# Altium PCB PCB1.PcbDoc
Units mm, origin at the board's own origin, x right, y up, seen from the top; angles counter-clockwise.
Board outline 60 x 125 mm, 2 copper layers (Top Layer, Bottom Layer), stack 1.48 mm thick; 50 components, 47 nets, 159 pads, 20 vias.
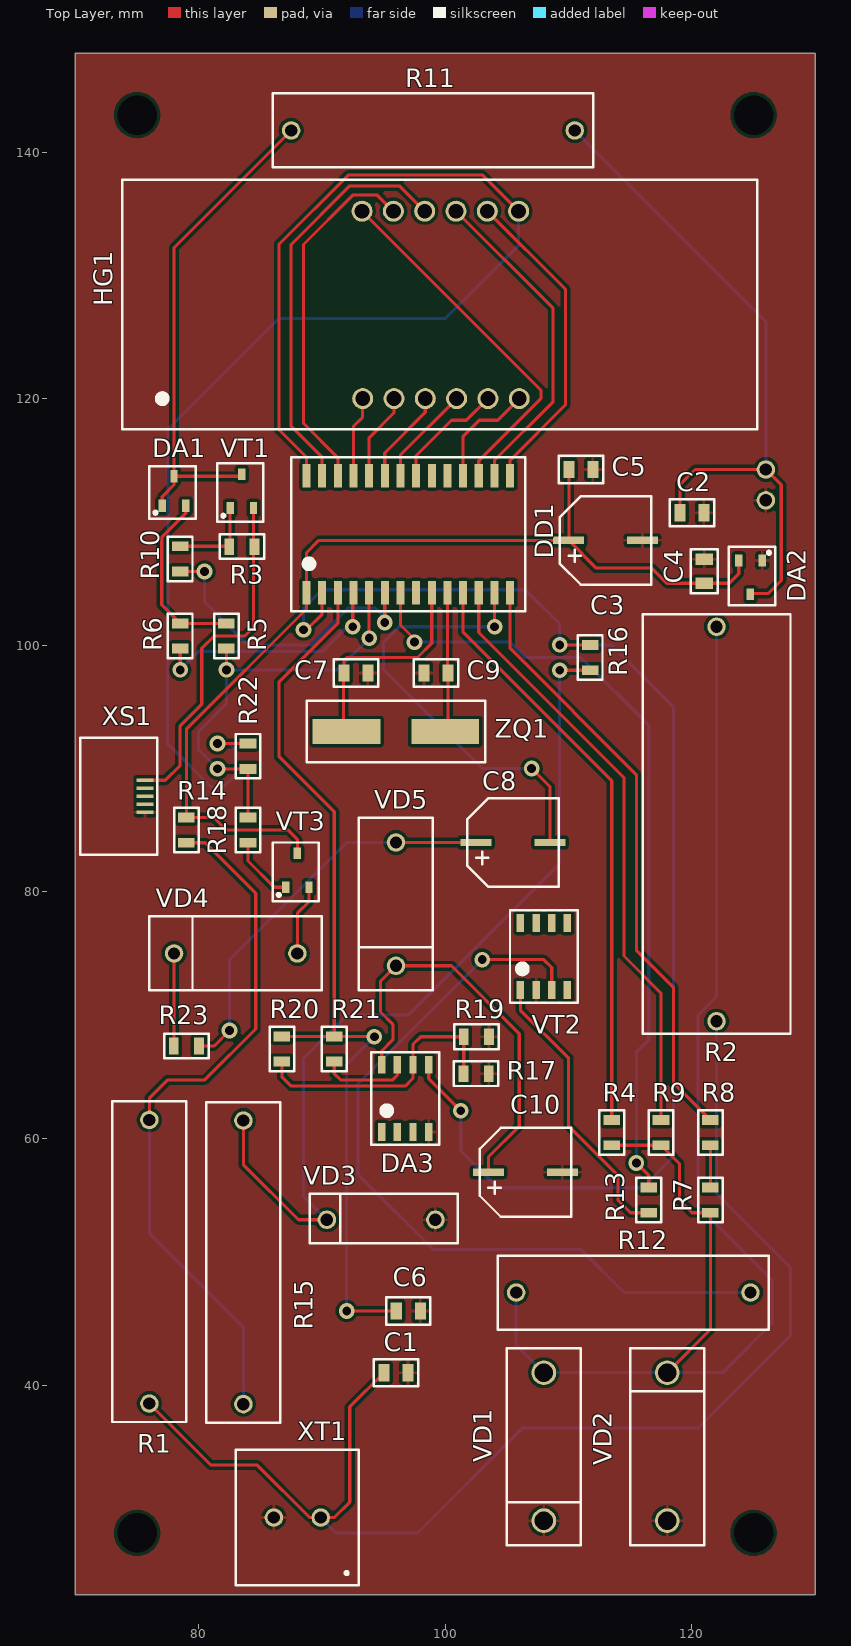
[diagram p0: Top Layer view]
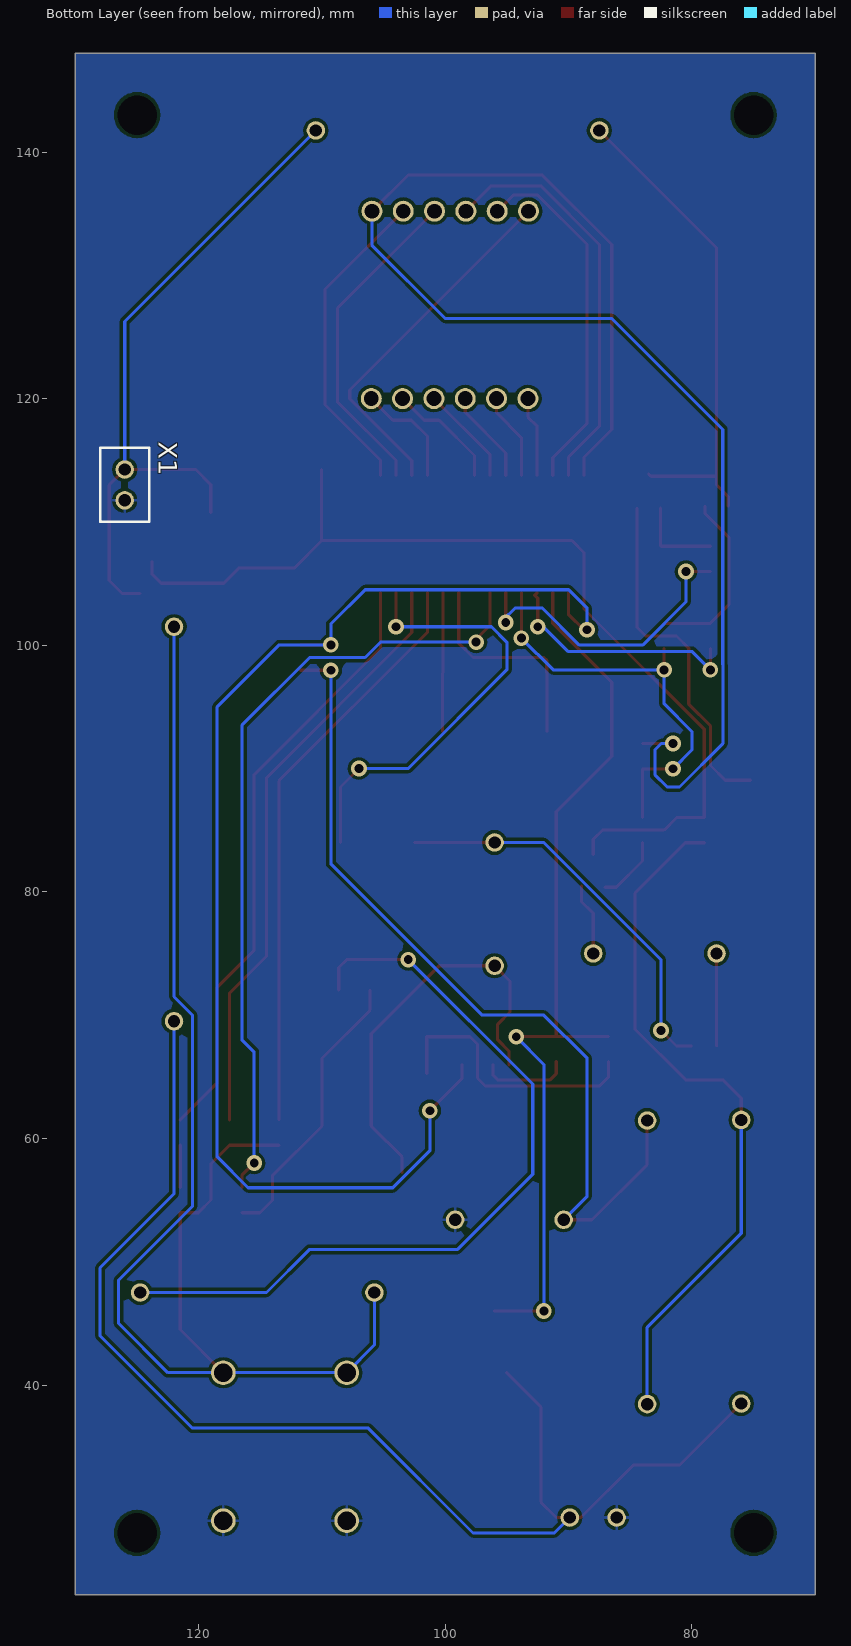
[diagram p1: Bottom Layer view, seen from below]
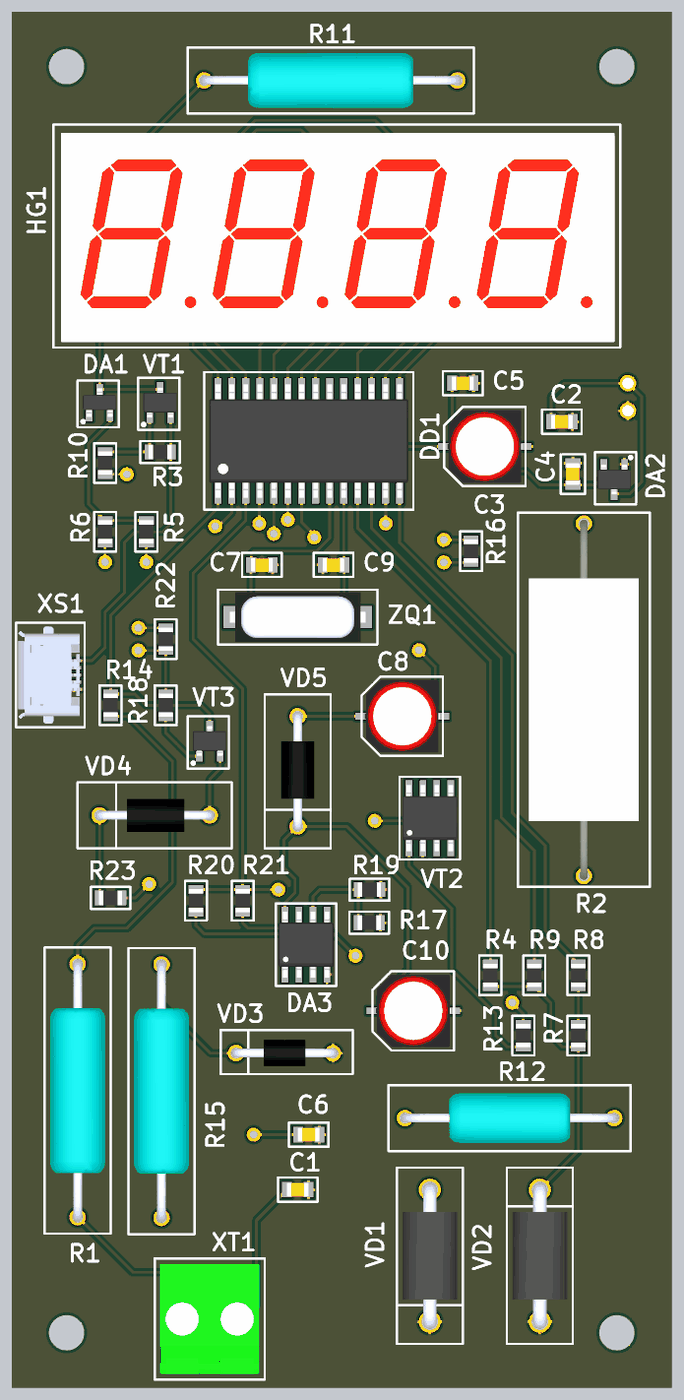
[diagram p2: 3D render of the assembled board from above, using the file's embedded part models]

## Layer stack, top to bottom
Top Solder: solder mask 0.01, Solder Resist, Dk 3.5
Top Layer: signal copper 0.035
Dielectric 1: dielectric 1.41, FR-4, Dk 4.8
Bottom Layer: signal copper 0.035
Bottom Solder: solder mask 0.01, Solder Resist, Dk 3.5

## Board outline
70,23 130,23 130,148 70,148

## Design rules (kind name [scope] priority, off if disabled: settings)
Clearance [All] p1: gap=0.254 ignorepadtopadclearanceinfootprint=FALSE except(0: Arc-Hole Track-Hole SMDPad-Hole THPad-Hole Via-Hole Fill-Hole Poly-Hole Region-Hole Text-Hole)
PolygonConnect [All] p1: connectstyle=Relief reliefconductorwidth=0.254 reliefentries=4 polygonreliefangle="90 Angle" airgapwidth=0.254
RoutingVias [All] p1: holewidth=0.711 width=1.27 viastyle="Through Hole" minholewidth=0.711 minwidth=1.27 maxholewidth=0.711 maxwidth=1.27
SolderMaskExpansion [All] p1: expansion=0.102
Width [All] p1: maxlimit=0.254 minlimit=0.254 preferedwidth=0.254
30 further rules are at their usual default settings.

## Classes and differential pairs
net class B[1..12]: B1 B2 B3 B4 B5 B6 B7 B8 B9 B10 B11 B12
net class A[1..3]: A1 A2 A3

## Components (designator, comment, footprint, x,y, rotation, side; value= is the part's Value field where it differs from the comment)
C1 "C" "CAP 220PF" 96,41 r180 top
C2 "C" "CAP 220PF" 120,110.75 r180 top
C3 "C+" "CAP 220MKF 16V" 113,108.5 r270 top
C4 "C" "CAP 220PF" 121,106 r270 top
C5 "C" "CAP 220PF" 111,114.25 r180 top
C6 "C" "CAP 220PF" 97,46 r180 top
C7 "C" "CAP 220PF" 92.75,97.75 r180 top
C8 "C+" "CAP 220MKF 16V" 105.5,84 r270 top
C9 "C" "CAP 220PF" 99.25,97.75 r0 top
C10 "C+" "CAP 220MKF 16V" 106.5,57.25 r270 top
DA1 "TL431ACP" TL431ACP 78,112.5 r90 top
DA2 "XC6206P33MR" XC6206P332MR 124.75,105.5 r270 top
DA3 "LM358N" LM358N 96.75,63.25 r90 top
DD1 "PIC16F837A-I/SP" PIC16F873A 97,109 r90 top
HG1 "HG" FYQ3641AX 99.55,127.5 r0 top
R1 "R" RES_2W 76,50 r90 top
R2 "R" RES_5W 122,85.5 r90 top
R3 "R" RES_SMD_0805 83.5,108 r180 top
R4 "R" RES_SMD_0805 113.5,60.475 r90 top
R5 "R" RES_SMD_0805 82.25,100.75 r270 top
R6 "R" RES_SMD_0805 78.5,100.75 r270 top
R7 "R" RES_SMD_0805 121.5,55 r90 top
R8 "R" RES_SMD_0805 121.5,60.475 r270 top
R9 "R" RES_SMD_0805 117.5,60.475 r90 top
R10 "R" RES_SMD_0805 78.5,107 r270 top
R11 "R" RES_2W 99,141.75 r0 top
R12 "R" RES_1W 115.25,47.5 r0 top
R13 "R" RES_SMD_0805 116.5,55 r90 top
R14 "R" RES_SMD_0805 79,85 r90 top
R15 "R" RES_2W 83.625,49.95 r270 top
R16 "R" RES_SMD_0805 111.75,99 r90 top
R17 "R" RES_SMD_0805 102.5,65.25 r180 top
R18 "R" RES_SMD_0805 84,85 r90 top
R19 "R" RES_SMD_0805 102.525,68.25 r180 top
R20 "R" RES_SMD_0805 86.75,67.25 r90 top
R21 "R" RES_SMD_0805 91,67.25 r270 top
R22 "R" RES_SMD_0805 84,91 r90 top
R23 "R" RES_SMD_0805 79,67.5 r0 top
VD1 "VD_2" HER508 108,35 r270 top
VD2 "VD_2" HER508 118,35 r90 top
VD3 "VD_1" 1N4728A 95,53.5 r180 top
VD4 "VD" 1N5817 83,75 r180 top
VD5 "VD" 1N5817 96,79 r270 top
VT1 "VT(полевой)" AO3401 83.5,112.5 r90 top
VT2 "VT(полевой)_1" IRF7413 108,74.75 r90 top
VT3 "VT(полевой)" AO3401 88,81.75 r90 top
X1 "X" PIN_2 126,113 r270 bottom
XS1 "XS" USB 73.4,88 r270 top
XT1 "XT" MA522-500M2 88,29.25 r180 top
ZQ1 "ZQ" ZQ 96,93 r0 top

## Footprints (in the part's own frame and the unit in brackets; to place one, negate y for a bottom-side part, rotate by r counter-clockwise, add the part's x,y. Pads: shape width x height; smd on the part's side, far side on the other; paste and mask are expansions set on the pad)
1N4728A [mm]
  round 1.5 hole 1: 1(-4.2,0.1) 2(4.6,0.1)
  silkscreen extent -6,-2 6,2, body extent -4.6,-1.13 5,1.28, height 3.2
1N5817 [mm]
  round 1.5 hole 1: 1(-5,0) 2(5,0)
  silkscreen extent -7,-3 7,3, body extent -5.4,-1.5 5.4,1.5, height 3
AO3401 [mm]
  rect 0.95x0.6 smd: 1(-1.375,0.95) 2(-1.375,-0.95) 3(1.375,0)
  silkscreen extent -2.5,-1.75 2.25,2, body extent -1.39,-1.52 1.39,1.52, height 1.1
"CAP 220MKF 16V" [mm]
  rect 0.6x2.5 smd: 1(0,-3) 2(0,3)
  silkscreen extent -3.6,-3.7 3.6,3.7, body extent -3.3,-3.4 3.3,3.4, height 6
"CAP 220PF" [mm] "Chip Capacitor, 2-Leads, Body 2,00x1,25mm, IPC Medium Density"
  rect 0.9x1.4 smd: 1(-0.975,0) 2(0.975,0)
  silkscreen extent -1.8,-1.1 1.8,1.1, body extent -1,-0.63 1,0.63, height 1
FYQ3641AX [mm]
  round 1.7 hole 1.2: 1(-6.25,-7.5) 2(-3.71,-7.5) 3(-1.17,-7.5) 4(1.37,-7.5) 5(3.91,-7.5) 6(6.45,-7.5) 7(6.4,7.7) 8(3.86,7.7) 9(1.32,7.7) 10(-1.22,7.7) 11(-3.76,7.7) 12(-6.3,7.7)
  silkscreen extent -25.75,-10 25.75,10.25, body extent -25.05,-9.5 25.25,9.5, height 8.3
HER508 [mm]
  round 2 hole 1.5: 1(-6,0) 2(6,0)
  silkscreen extent -8,-3 8,3, body extent -6.61,-2.5 6.62,2.5, height 5
IRF7413 [mm] "SOIC, 8-Leads, Body 4,90x3,90mm, Pitch 1,27mm, IPC Medium Density"
  rect 1.45x0.6 smd: 1(-2.725,1.905) 2(-2.725,0.635) 3(-2.725,-0.635) 4(-2.725,-1.905) 5(2.725,-1.905) 6(2.725,-0.635) 7(2.725,0.635) 8(2.725,1.905)
  silkscreen extent -3.75,-2.75 3.75,2.75, body extent -3,-2.5 3,2.5, height 1.55
LM358N [mm] "SOIC, 8-Leads, Body 4,91x3,90mm, Pitch 1,27mm, IPC Medium Density"
  rect 1.45x0.6 smd: 1(-2.725,1.905) 2(-2.725,0.635) 3(-2.725,-0.635) 4(-2.725,-1.905) 5(2.725,-1.905) 6(2.725,-0.635) 7(2.725,0.635) 8(2.725,1.905)
  silkscreen extent -3.75,-2.75 3.75,2.75, body extent -3,-2.5 3,2.5, height 1.75
MA522-500M2 [mm]
  round 1.5 hole 1: 1(-1.9,0) 2(1.9,0)
  silkscreen extent -5,-5.5 5,5.5, body extent -4.5,-5 4.5,5, height 10
PIC16F873A [mm] "SOP, 28-Leads, Body 17,86x7,46mm, Pitch 1,27mm, IPC Medium Density"
  rect 1.9x0.65 smd: 1(-4.75,8.255) 2(-4.75,6.985) 3(-4.75,5.715) 4(-4.75,4.445) 5(-4.75,3.175) 6(-4.75,1.905) 7(-4.75,0.635) 8(-4.75,-0.635) 9(-4.75,-1.905) 10(-4.75,-3.175) 11(-4.75,-4.445) 12(-4.75,-5.715) 13(-4.75,-6.985) 14(-4.75,-8.255) 15(4.75,-8.255) 16(4.75,-6.985) 17(4.75,-5.715) 18(4.75,-4.445) 19(4.75,-3.175) 20(4.75,-1.905) 21(4.75,-0.635) 22(4.75,0.635) 23(4.75,1.905) 24(4.75,3.175) 25(4.75,4.445) 26(4.75,5.715) 27(4.75,6.985) 28(4.75,8.255)
  silkscreen extent -6.25,-9.5 6.25,9.5, body extent -5.15,-9.05 5.15,9.05, height 2.5
PIN_2 [mm]
  round 1.5 hole 1: 1(-1.25,0) 2(1.25,0)
  silkscreen extent -3,-2 3,2, body extent -2.5,-1.25 2.5,1.25, height 7.5
RES_1W [mm]
  round 1.5 hole 1: 1(-9.5,0) 2(9.5,0)
  silkscreen extent -11,-3 11,3, body extent -9.9,-2.25 9.9,2.25, height 4.75
RES_2W [mm]
  round 1.5 hole 1: 1(-11.5,0) 2(11.5,0)
  silkscreen extent -13,-3 13,3, body extent -11.9,-2.5 11.9,2.5, height 5
RES_5W [mm]
  round 1.5 hole 1: 1(-16,0) 2(16,0)
  silkscreen extent -17,-6 17,6, body extent -16.35,-5 16.35,5, height 9.2
RES_SMD_0805 [mm]
  rect 0.8x1.35 smd: 1(-1.025,0) 2(1.025,0)
  silkscreen extent -1.8,-1 1.8,1, body extent -1.05,-0.65 1.05,0.65, height 0.5
TL431ACP [mm]
  rect 1x0.6 smd: 1(-1.2,0.95) 2(-1.2,-0.95) 3(1.2,0)
  silkscreen extent -2.25,-1.75 2,2, body extent -1.3,-1.52 1.3,1.52, height 0.95
USB [mm]
  rect 0.3x1.35 smd: 1(-1.05,2.25) 2(-0.4,2.25) 3(0.25,2.25) 4(0.9,2.25) 5(1.55,2.25)
  silkscreen extent -4.5,-3 5,3.25, body extent -4.15,-2.8 4.65,2.8, height 2.83
XC6206P332MR [mm]
  rect 0.95x0.6 smd: 1(-1.375,0.95) 2(-1.375,-0.95) 3(1.375,0)
  silkscreen extent -2.5,-1.75 2.25,2, body extent -1.39,-1.52 1.39,1.52, height 1.1
ZQ [mm]
  rect 5.5x2 smd: 1(-4,0) 2(4,0)
  silkscreen extent -7.25,-2.5 7.25,2.5, body extent -6.15,-2.25 6.15,2.25, height 5.4

## Free pads (board coordinates)
  round 0 hole 3.2: ""(75,28) ""(75,143) ""(125,28) ""(125,143)

## Via types
v1: diameter 1.27, hole 0.711, Top Layer to Bottom Layer, 20 vias

## Nets (pads, with @x,y where several pads share a name; then routed paths per layer and width w, separated by ;. In a path a pad name is that pad's centre, name@x,y a point inside that pad or via, vN(x,y) a via of type N, cw(c..) or ccw(c..) an arc to the next point about the centre after c; other vN are vias at no path point)
A1: DD1.11 R4.2 | length 47.7
  Top Layer w0.254: DD1.11 101.445,101.055 113.5,89 R4.2
A2: DD1.12 R9.2 | length 48.9
  Top Layer w0.254: DD1.12 102.715,101.035 114.492,89.258 114.492,74.79 117.5,71.782 R9.2
A3: DD1.14 R8.1 | length 49.5
  Top Layer w0.254: DD1.14 105.255,99.745 115.5,89.5 115.5,75.25 118.5,72.25 118.5,64.5 R8.1
B1: DD1.21 HG1.5 | length 9.4
  Top Layer w0.254: DD1.21 97.635,115.385 100.5,118.25 101.71,118.25 HG1.5
B2: DD1.22 HG1.4 | length 8.1
  Top Layer w0.254: DD1.22 96.365,115.445 HG1.4
B3: DD1.23 HG1.3 | length 7.6
  Top Layer w0.254: DD1.23 95.095,115.595 98.38,118.88 HG1.3
B4: DD1.24 HG1.2 | length 7.1
  Top Layer w0.254: DD1.24 93.825,116.825 95.84,118.84 HG1.2
B5: DD1.25 HG1.1 | length 6.6
  Top Layer w0.254: DD1.25 92.555,117.755 93.3,118.5 HG1.1
B6: DD1.26 HG1.11 | length 29.4
  Top Layer w0.254: DD1.26 91.285,115.215 88.5,118 88.5,132.5 92.5,136.5 94.49,136.5 HG1.11
B7: DD1.27 HG1.10 | length 33.4
  Top Layer w0.254: DD1.27 90.015,115.235 87.5,117.75 87.5,132.5 92.25,137.25 96.28,137.25 HG1.10
B8: DD1.28 HG1.7 R22.2 | length 119.1
  Top Layer w0.254: v1(81.525,92.025) R22.2 ; DD1.28 88.745,115.255 86.5,117.5 86.5,132.5 92.125,138.125 103.025,138.125 HG1.7
  Bottom Layer w0.254: v1(81.525,92.025) 82.475,92.025 83,91.5 83,89.5 82,88.5 81,88.5 77.484,92.016 77.484,98.421 77.5,98.437 77.5,117.5 86.5,126.5 100,126.5 105.95,132.45 HG1.7
B9: DD1.15 HG1.8 | length 25.9
  Top Layer w0.254: HG1.8 109.75,128.86 109.75,119.5 105.255,115.005 DD1.15
B10: DD1.16 HG1.9 | length 26.7
  Top Layer w0.254: HG1.9 108.75,127.32 108.75,119.75 103.985,114.985 DD1.16
B11: DD1.17 HG1.12 | length 29.5
  Top Layer w0.254: HG1.12 107.75,120.7 107.75,120 102.715,114.965 DD1.17
B12: DD1.18 HG1.6 | length 9
  Top Layer w0.254: DD1.18 101.445,116.945 102.75,118.25 104.25,118.25 HG1.6
DA3_VCC: C10.1 DA3.8 VD5.2 | length 33.9
  Top Layer w0.254: DA3.8 94.845,67.095 95.75,68 95.75,69.25 94.75,70.25 94.75,72.75 VD5.2 100.5,74 106,68.5 106,61 103.5,58.5 C10.1
DD1_VDD: C3.1 C4.2 C5.2 DA2.2 DD1.1 R14.2 VT3.3 | length 80.5
  Top Layer w0.254: VT3.3@88,83.025 VT3.3 88,84.25 87.25,85 82.25,85 81.225,86.025 R14.2 79,93.187 88.745,102.932 DD1.1 88.745,107.495 89.75,108.5 C3.1 ; C5.2 110.025,108.525 C3.1 ; DA2.2@123.8,106.8 123.8,105.8 123.025,105.025 C4.2 117.975,105.025 116.75,106.25 112.25,106.25 C3.1
NetC1_2: C1.2 R1.1 R2.1 XT1.1 | length 105.5
  Top Layer w0.254: R1.1 81,33.5 84.75,33.5 89,29.25 XT1.1 91,29.25 92.25,30.5 92.25,38.225 C1.2
  Bottom Layer w0.254: XT1.1 91.15,28 97.75,28 106.25,36.5 120.5,36.5 128,44 128,49.5 122,55.5 R2.1
NetC2_2: C2.2 DA2.3 R11.2 X1.1 | length 56.2
  Top Layer w0.254: C2.2 119.025,113.025 120.25,114.25 X1.1 127.25,113 127.25,105.25 126.2,104.2 DA2.3@124.75,104.2
  Bottom Layer w0.254: R11.2@110.375,141.625 110.625,141.625 126,126.25 X1.1
NetC6_2: C6.2 DD1.3 R20.2 R21.1 | length 75
  Top Layer w0.254: R20.2 R21.1 ; DD1.3 91.285,101.785 86.5,97 86.5,91 91,86.5 R21.1 ; v1(92,46) C6.2 ; v1@93.75,68.25 v1(94.25,68.25) 94.225,68.275 R21.1
  Bottom Layer w0.254: v1(92,46) 92,66 v1(94.25,68.25)
NetC7_2: C7.2 DD1.9 ZQ1.1 | length 17.6
  Top Layer w0.254: ZQ1.1@91.75,93 91.75,97.725 C7.2 91.775,98.775 92,99 97.75,99 98.905,100.155 DD1.9
NetC8_1: C8.1 R23.2 VD5.1 | length 32.7
  Top Layer w0.254: R23.2 81.25,67.5 v1(82.5,68.75) ; VD5.1 C8.1
  Bottom Layer w0.254: v1(82.5,68.75) 82.5,74.5 92,84 VD5.1
NetC8_2: C8.2 DD1.13 | length 36.5
  Top Layer w0.254: DD1.13 104,104.235 v1(104,101.5) ; v1(107,90) 108.5,88.5 C8.2
  Bottom Layer w0.254: v1(104,101.5) 96.25,101.5 95,100.25 95,98 103,90 v1(107,90)
NetC9_2: C9.2 DD1.10 ZQ1.2 | length 11.3
  Top Layer w0.254: C9.2@100.175,97.75 DD1.10 ; ZQ1.2@100.225,93 C9.2
NetDA1_1: DA1.1 DA1.3 R11.1 VT1.3 | length 40.4
  Top Layer w0.254: DA1.1 77.05,112.05 78,113 DA1.3 ; VT1.3 83.325,113.7 DA1.3 ; R11.1 78,132.25 DA1.3
NetDA1_2: DA1.2 R5.1 R6.1 | length 14.7
  Top Layer w0.254: DA1.2 78.95,110.7 77,108.75 77,103.275 R6.1 R5.1
NetDA3_5: DA3.5 DD1.2 R16.2 | length 107.6
  Top Layer w0.254: v1(88.5,101.25) 88.75,101.25 90.015,102.515 DD1.2 ; DA3.5 98.655,64.845 v1(101.25,62.25) ; v1(109.275,100.025) R16.2
  Bottom Layer w0.254: v1(88.5,101.25) 88.5,103 90,104.5 106.5,104.5 109.275,101.725 v1(109.275,100.025) 113.475,100.025 118.5,95 118.5,58.5 116,56 104.25,56 101.25,59 v1(101.25,62.25)
NetDA3_6: DA3.6 R17.2 R19.2 R20.1 | length 22.6
  Top Layer w0.254: R20.1 86.75,65 87.508,64.242 96.742,64.242 97.385,64.885 DA3.6 97.385,67.635 98,68.25 R19.2 101.5,65.275 R17.2
NetDA3_7: DA3.7 R21.2 | length 7.3
  Top Layer w0.254: R21.2 91,65.25 91.5,64.75 95.75,64.75 96.115,65.115 DA3.7
NetDD1_4: DD1.4 R6.2 | length 20.1
  Top Layer w0.254: v1(78.5,98) R6.2 ; v1(92.5,101.5) 92.5,103.805 92.75,104.055 DD1.4
  Bottom Layer w0.254: v1(78.5,98) 80,99.5 90.055,99.5 92.055,101.5 v1(92.5,101.5)
NetDD1_5: DD1.5 R5.2 R18.2 R22.1 | length 34.1
  Top Layer w0.254: v1(81.525,89.975) R22.1 R18.2 ; v1(82.25,98) R5.2 ; v1(93.825,100.575) DD1.5
  Bottom Layer w0.254: v1(81.525,89.975) 80,91.5 80,93 82.25,95.25 v1(82.25,98) 91.25,98 v1(93.825,100.575)
NetDD1_6: DD1.6 R10.2 | length 25
  Top Layer w0.254: R10.2 v1(80.475,105.975) ; v1(95.095,101.845) DD1.6
  Bottom Layer w0.254: v1(80.475,105.975) 80.475,103.525 83.992,100.008 89.126,100.008 92.134,103.016 94.329,103.016 95.25,102.095 95.095,101.94 v1(95.095,101.845)
NetDD1_7: DD1.7 R13.2 | length 64.7
  Top Layer w0.254: DD1.7 96.365,101.635 97.5,100.5 v1(97.5,100.25) ; v1(115.5,58) 116.5,57 R13.2
  Bottom Layer w0.254: v1@97.5,100.484 97.734,100.25 105.25,100.25 106.5,99 111,99 116.5,93.5 116.5,68 115.5,67 v1(115.5,58)
NetG1_1: 
NetG1_2: 
NetR1_2: R1.2 R14.1 R15.2 | length 57.2
  Top Layer w0.254: R1.2 76,63.25 77.5,64.75 80.5,64.75 84.625,68.875 84.625,79.875 80.525,83.975 R14.1
  Bottom Layer w0.254: R1.2 76,52.3 83.625,44.675 R15.2
NetR2_2: R2.2 R4.1 R7.1 R9.1 R12.1 VD1.1 VD2.2 | length 113.6
  Top Layer w0.254: R4.1 R9.1 119,57.95 119,55 120.025,53.975 R7.1 121.5,44.5 VD2.2
  Bottom Layer w0.254: R12.1 105.75,43.25 VD1.1 122.5,41 126.5,45 126.5,48.5 120.5,54.5 120.5,70 122,71.5 R2.2
NetR3_1: R3.1 VT1.2 XS1.1 | length 28.6
  Top Layer w0.254: XS1.1@75.25,89.05 XS1.1 77.3,89.05 78.492,90.242 78.492,93.46 80.25,95.218 80.25,99.75 81.25,100.75 83.75,100.75 84.45,101.45 VT1.2
NetR3_2: R3.2 R10.1 VT1.1 | length 7.1
  Top Layer w0.254: R10.1 82.45,108.025 R3.2 82.55,108.075 VT1.1
NetR7_2: R7.2 R8.2 | length 3.4
  Top Layer w0.254: R7.2 R8.2
NetR12_2: R12.2 VT2.3 | length 64.4
  Top Layer w0.254: v1(103,74.5) 108,74.5 108.635,73.865 VT2.3
  Bottom Layer w0.254: v1(103,74.5) 92.908,64.408 92.908,57.092 99,51 111,51 114.5,47.5 R12.2@124,47.5
NetR13_1: R13.1 VT2.1 | length 23.2
  Top Layer w0.254: VT2.1 106.095,70.405 110,66.5 110,61 114,57 114,55 115.025,53.975 R13.1
NetR15_1: R15.1 R16.1 VD3.2 | length 71.6
  Top Layer w0.254: R15.1 83.625,57.875 88.1,53.4 VD3.2 ; v1(109.275,97.975) R16.1
  Bottom Layer w0.254: VD3.2 88.5,55.3 88.5,66.5 92,70 97,70 109.275,82.275 v1(109.275,97.975)
NetR18_1: R18.1 VT3.1 | length 5.4
  Top Layer w0.254: R18.1 84,82.5 86.125,80.375 VT3.1
NetR23_1: R23.1 VD4.2 | length 7.5
  Top Layer w0.254: R23.1 78,67.525 VD4.2
NetVD4_1: VD4.1 VT3.2 | length 5.9
  Top Layer w0.254: VD4.1 88,78.25 88.95,79.2 VT3.2 VT3.2@88.95,80.475
VSS: C1.1 C2.1 C3.2 C4.1 C5.1 C6.1 C7.1 C9.1 C10.2 DA2.1 DA3.4 R17.1 R19.1 VD1.2 VD2.1 VD3.1 VT2.2 X1.2 XS1.5 XT1.2
pads on no net: DA3.1 DA3.2 DA3.3 DD1.8 DD1.19 DD1.20 VT2.4 VT2.5 VT2.6 VT2.7 VT2.8 XS1.2 XS1.3 XS1.4

## Polygon pours and split planes (outlines as drawn)
VSS on Bottom Layer "Top Layer-No Net" (solid, remove dead copper, pour order 2): 70,148 130,148 130,23 70,23
VSS on Top Layer "Top Layer-No Net" (solid, remove dead copper, pour order 0): 70,148 130,148 130,23 70,23